# EAGLE board freezer-monitor (EAGLE 9.1.3)
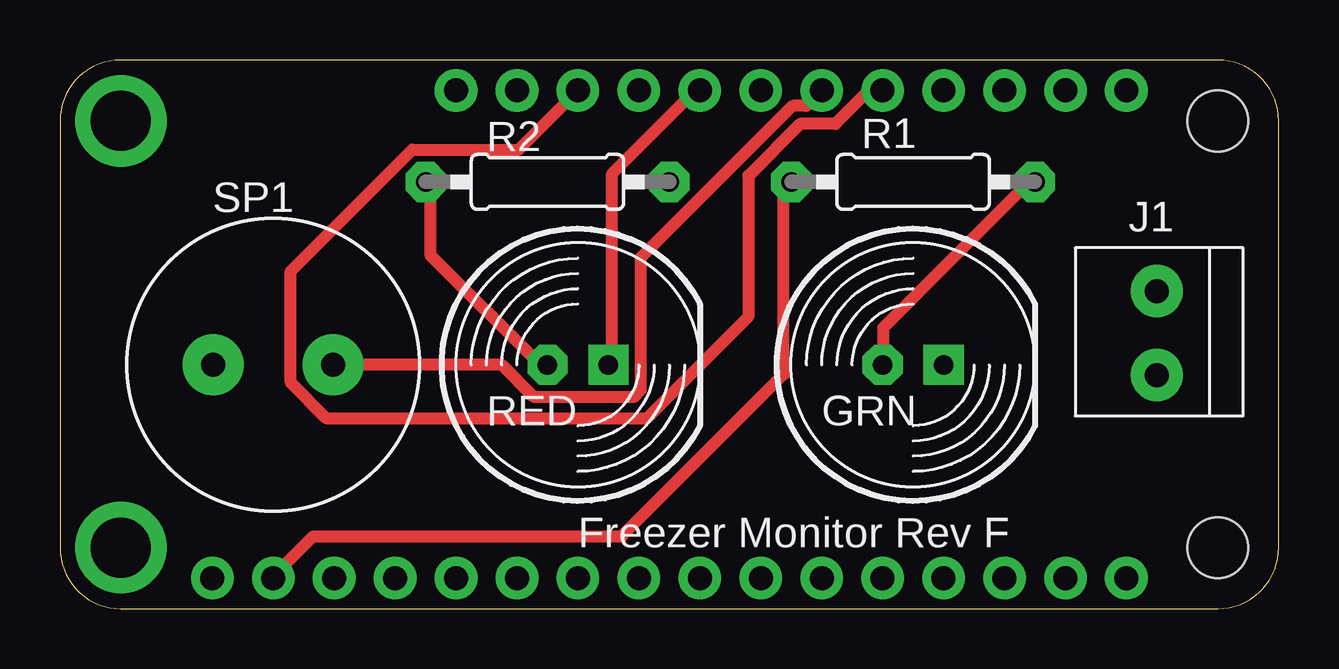
[diagram p0: board, top side]
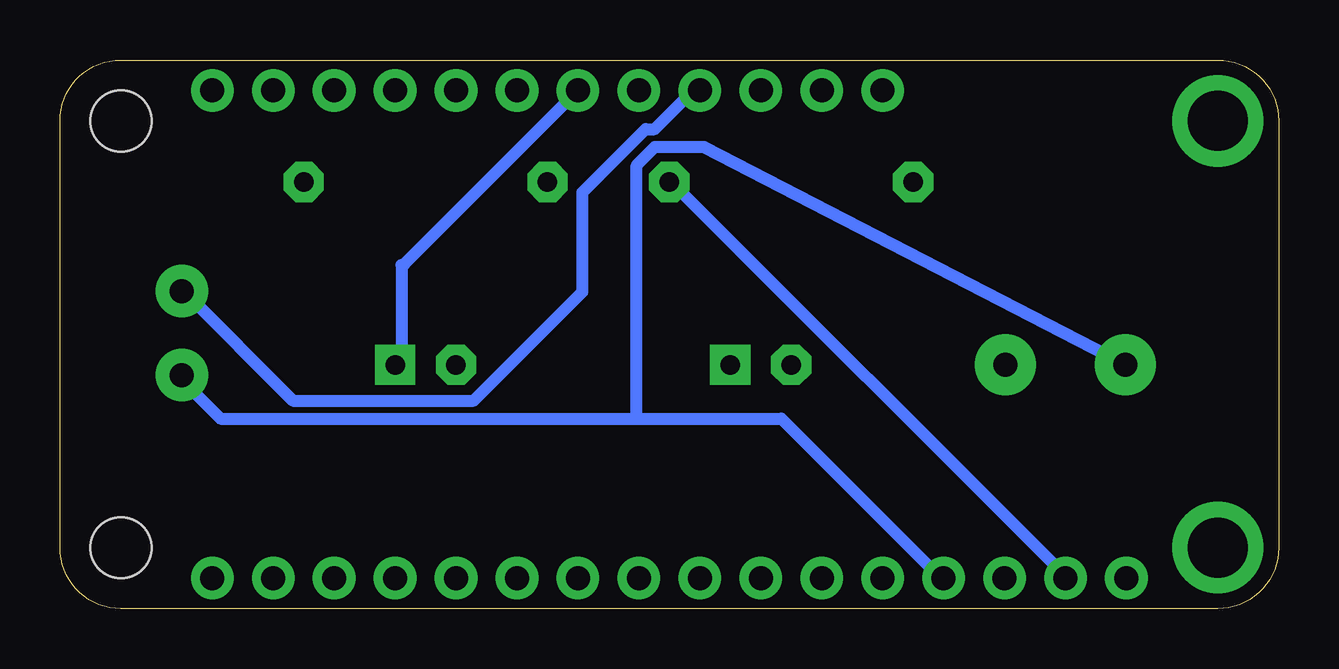
[diagram p1: board, bottom side, seen from below]

Size 50.8 x 22.86 mm. Coordinates in mm from the lower left corner, seen from the top.
Copper layers (1*16): Top 0.035mm / dielectric 1.5mm / Bottom 0.035mm
Design rules "freezer-monitor": minimum track width 6mil, minimum drill 0.35mm, track to track 0.205mm, track to pad 0.205mm, pad to pad 0.205mm, via to via 0.205mm, smd to smd 6mil, copper to edge 40mil, drill to drill 6mil, minimum pad ring 10mil, minimum via ring 8mil, stop-mask expansion 4mil, vias tented up to drill 0mil, thermal gap 10mil
Net classes: 0 default: width 0.5 mm, drill 0.508 mm, clearance 0.254 mm

## Footprints (pad centres in the part's own frame; a part is rotated, then mirrored left to right if it is on the bottom)
LED10MM = drill 0.813 pad 1.676 octagon: A -1.27,0 | drill 0.813 pad 1.676 square: K 1.27,0
1X2-3.5MM = drill 1 pad 2.184: 1 1.8,0; 2 -1.7,0
FEATHERWING = drill 1 pad 1.778: 1 6.35,1.27; 2 8.89,1.27; 3 11.43,1.27; 4 13.97,1.27; 5 16.51,1.27; 6 19.05,1.27; 7 21.59,1.27; 8 24.13,1.27; 9 26.67,1.27; 10 29.21,1.27; 11 31.75,1.27; 12 34.29,1.27; 13 36.83,1.27; 14 39.37,1.27; 15 41.91,1.27; 16 44.45,1.27; 17 44.45,21.59; 18 41.91,21.59; 19 39.37,21.59; 20 36.83,21.59; 21 34.29,21.59; 22 31.75,21.59; 23 29.21,21.59; 24 26.67,21.59; 25 24.13,21.59; 26 21.59,21.59; 27 19.05,21.59; 28 16.51,21.59 | drill 2.5 pad 3.81: P$1 2.54,20.32; P$2 2.54,2.54 | hole 2.54: 48.26,20.32; 48.26,2.54
0207/10 = drill 0.813 pad 1.676 octagon: 1 -5.08,0; 2 5.08,0
PS12 = drill 1 pad 2.54: P$1 -2.5,0; P$2 2.5,0

## Placement (x,y rotation side)
GRN  [LED10MM]  35.56,10.16 0 top
J1  1X2-3.5MM  [1X2-3.5MM]  45.72,11.43 90 top
MS1  FEATHERWING  [FEATHERWING]  0,0 0 top
R1  560  [0207/10]  35.56,17.78 0 top
R2  560  [0207/10]  20.32,17.78 180 top
RED  [LED10MM]  21.59,10.16 0 top
SP1  SPEAKER/PS12  [PS12]  8.89,10.16 0 top

## Library data of the parts
GRN RED = led
J1 MS1 R1 R2 SP1 = adafruit

## Nets
3V: MS1.2 R1.1 R2.1
GND: J1.2 MS1.4 SP1.P$1
N$1: MS1.24 RED.K
N$2: GRN.A R1.2
N$3: J1.1 MS1.25
N$4: R2.2 RED.A
N$5: GRN.K MS1.23
N$6: MS1.22 SP1.P$2
USB: MS1.21 MS1.26

## Tracks (layer width: path | path; a pad name or v marks a point on that pad's centre or on a via)
3V
  Top 0.5: R1.1 30.16,17.72 30.16,9.76 23.41,3.02 10.56,3.02 9.05,1.51 MS1.2
  Bottom 0.5: R2.1 25.26,17.72 9.05,1.51 MS1.2
GND
  Bottom 0.5: 26.77,7.92 44.11,7.92 45.62,9.43 J1.2 | 26.77,7.92 20.73,7.92 14.33,1.51 MS1.4 | 26.77,7.92 26.77,18.47 26.01,19.23 23.95,19.23 SP1.P$1
N$1
  Top 0.5: RED.K 23,10.18 23,18.1 26.39,21.49 MS1.24
N$2
  Top 0.5: GRN.A 34.31,10.18 34.31,11.69 40.34,17.72 R1.2
N$3
  Bottom 0.5: MS1.25 24.5,21.49 26.01,19.98 26.39,19.98 29.03,17.34 29.03,13.2 33.55,8.67 41.09,8.67 45.62,13.2 J1.1
N$4
  Top 0.5: R2.2 15.46,17.72 15.46,14.7 19.98,10.18 RED.A
N$5
  Bottom 0.5: GRN.K 36.57,10.18 36.57,14.33 36.47,14.33 MS1.23
N$6
  Top 0.5: 31.67,21.49 MS1.22 31.11,20.95 30.54,20.95 24.2,14.61 24.2,9.11 23.91,8.82 19.76,8.82 18.42,10.16 SP1.P$2
USB
  Top 0.5: MS1.21 33.72,21.59 32.33,20.2 30.85,20.2 28.69,18.04 28.69,12.17 24.44,7.92 11.12,7.92 9.62,9.43 9.62,14.05 14.68,19.12 19.12,19.12 MS1.26

## Text on the board
tNames: Freezer Monitor Rev F